# EAGLE board circuito v6-pv (EAGLE 9.4.2)
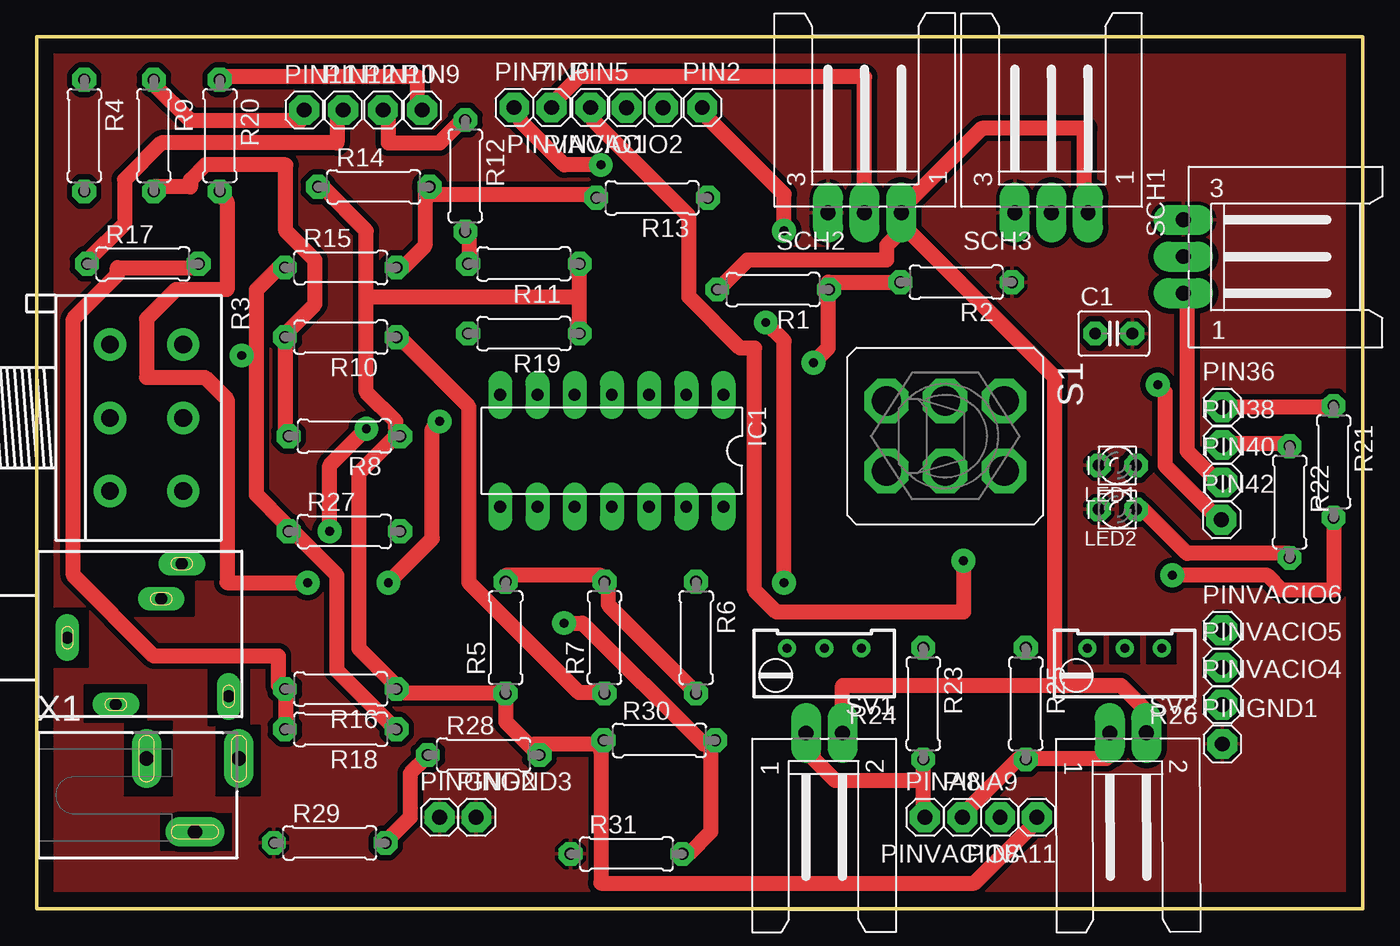
[diagram p0: board, top side]
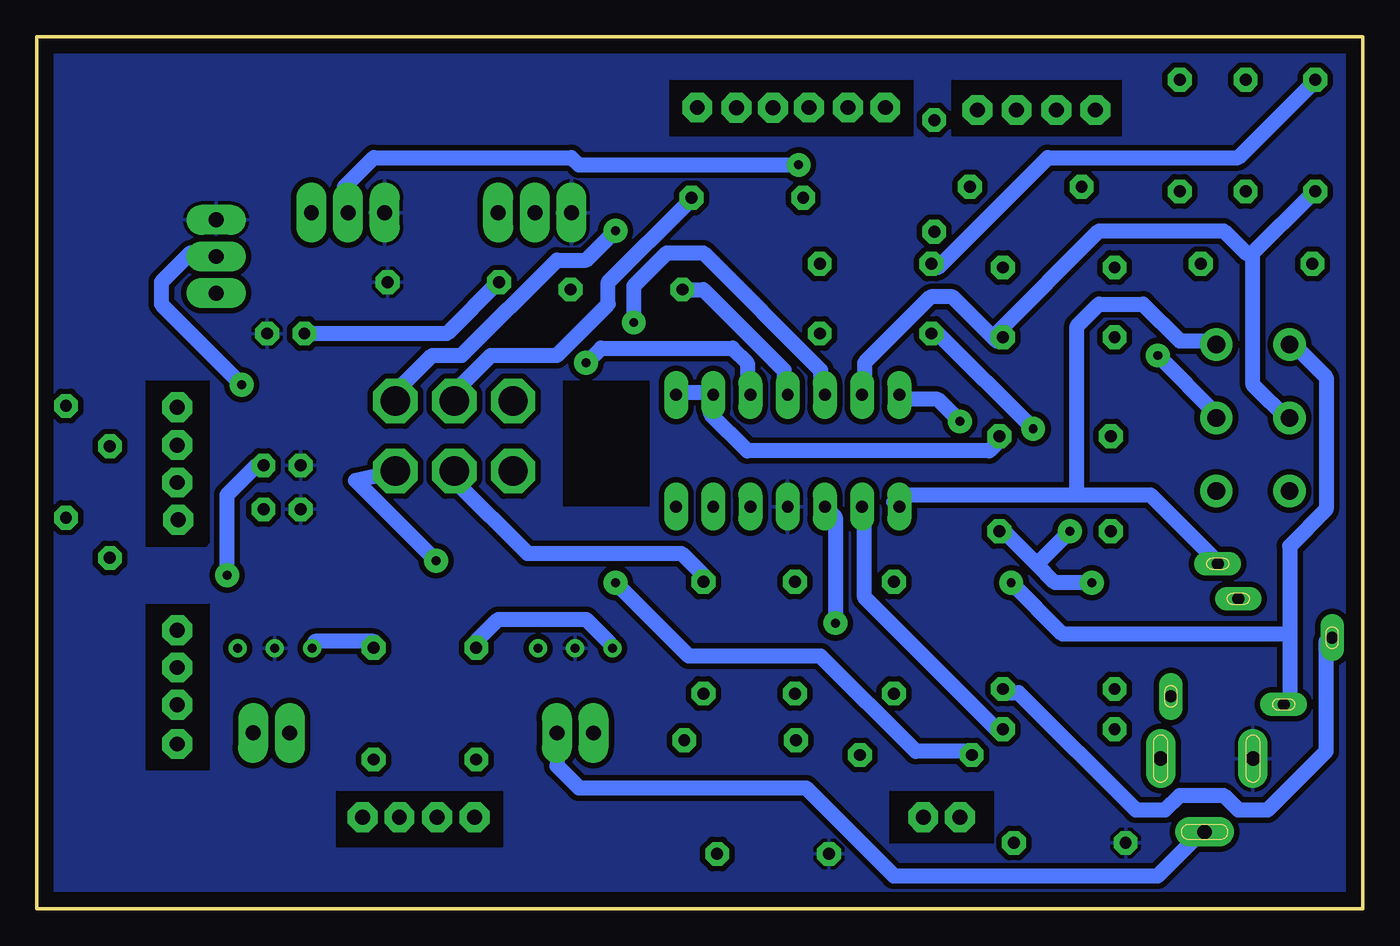
[diagram p1: board, bottom side, seen from below]

Size 90.5 x 59.5 mm. Coordinates in mm from the lower left corner, seen from the top.
Outline: 0,0 90.5,0 90.5,59.5 0,59.5 0,0
Copper layers (1*16): Top 0.035mm / dielectric 1.5mm / Bottom 0.035mm
Design rules "default *": minimum track width 40mil, minimum drill 24mil, track to track 15mil, track to pad 15mil, pad to pad 15mil, via to via 15mil, smd to smd 8mil, copper to edge 40mil, drill to drill 8mil, minimum pad ring 10mil, minimum via ring 20mil, stop-mask expansion 4mil, vias tented up to drill 0mil, thermal gap 10mil
Net classes: 1 vcc: width 0.305 mm
tRestrict: area 50.2,16.8 to 52.2,18.8; area 52.8,16.8 to 54.8,18.8; area 55.2,16.8 to 57.2,18.8; area 70.8,16.8 to 72.8,18.8; area 73.2,16.8 to 75.2,18.8; area 75.8,16.8 to 77.8,18.8; area 28.2,19.2 to 28.2,22.8; area 30.2,33 to 48.2,37.5; area 30.2,25.2 to 48.2,29.5; area 3.2,37 to 6.5,40; area 8.5,37 to 11.5,40; area 3.2,32 to 6.5,35; 12 more areas
bRestrict: area 25.2,4.5 to 32.2,8; area 58.8,4.2 to 70,8; area 78.8,9.5 to 83,20.8; area 78.8,24.8 to 83,36; area 16.5,52.8 to 28,56.5; area 30.8,52.8 to 47.2,56.5; area 48.8,27.5 to 54.5,36
vRestrict: area 50.5,48 to 75.5,59.2; area 78.5,38.2 to 90.5,50.5; area 48.8,0.2 to 58.5,11.8; area 69.5,0.2 to 79.5,11.8; area 48.8,14.2 to 58.8,19.2; area 69.2,14.2 to 79.2,19.2; area 0,3.5 to 13.8,59.2; area 30.2,29.5 to 48.2,33

## Footprints (pad centres in the part's own frame; a part is rotated, then mirrored left to right if it is on the bottom)
C025-030X050 = drill 0.813 octagon: 1 -1.27,0; 2 1.27,0
DIL14 = drill 0.813 long: 1 -7.62,-3.81; 2 -5.08,-3.81; 3 -2.54,-3.81; 4 0,-3.81; 5 2.54,-3.81; 6 5.08,-3.81; 7 7.62,-3.81; 8 7.62,3.81; 9 5.08,3.81; 10 2.54,3.81; 11 0,3.81; 12 -2.54,3.81; 13 -5.08,3.81; 14 -7.62,3.81
LED_LD260 = drill 0.813 octagon: A -1.27,0; K 1.27,0
1503_09 = drill 0.8 pad 1.2 long: 1 0,-2.1; 2 -4.55,-5.4; 3 5.05,-9.9; 4 -4,-13.1; 5 2.65,-8.5
1X01 = drill 1.016 octagon: 1 0,0
0207/7 = drill 0.813 octagon: 1 -3.81,0; 2 3.81,0
3RP/1610G = drill 1.2 pad 2.184: 1-1 -5,0; 1-2 0,0; 1-3 5,0; 2-1 -5,5; 2-2 0,5; 2-3 5,5
RTRIM64W = drill 0.61: 1 1.27,-2.54; 2 1.27,0; 3 1.27,2.54
320-938 = drill 2.007 octagon: 1 -2.388,4.013; 2 -2.388,0; 3 -2.388,-4.013; 4 2.388,4.013; 5 2.388,0; 6 2.388,-4.013
L03P = drill 1.016 long: 1 2.5,-6.25; 2 0,-6.25; 3 -2.5,-6.25
L02P = drill 1.016 long: 1 1.25,-6.25; 2 -1.25,-6.25
SCD-014-A = drill 1 pad 2 long: 1 -2.5,13.8; 2 -2.5,7.5; 3 2.5,10.8

## Placement (x,y rotation side)
C1  10micro  [C025-030X050]  73.5,39.25 0 top
IC1  LM324N  [DIL14]  39.25,31.25 180 top
LED1  [LED_LD260]  73.75,30.25 180 top
LED2  [LED_LD260]  73.75,27.25 180 top
PHONES  1503_09  [1503_09]  0,18.5 90 top
PIN2  [1X01]  45.42,54.67 0 top
PIN5  [1X01]  37.8,54.67 0 top
PIN6  [1X01]  35.13,54.67 0 top
PIN7  [1X01]  32.59,54.67 0 top
PIN9  [1X01]  26.3,54.5 0 top
PIN10  [1X01]  23.63,54.5 0 top
PIN11  [1X01]  18.25,54.5 0 top
PIN12  [1X01]  20.92,54.5 0 top
PIN36  [1X01]  80.9,34.22 0 top
PIN38  [1X01]  80.9,31.64 0 top
PIN40  [1X01]  80.9,29.09 0 top
PIN42  [1X01]  80.85,26.55 0 top
PINA8  [1X01]  60.62,6.25 0 top
PINA9  [1X01]  63.17,6.25 0 top
PINA11  [1X01]  68.25,6.25 180 top
PINGND1  [1X01]  80.9,11.25 0 top
PINGND2  [1X01]  27.5,6.25 0 top
PINGND3  [1X01]  30,6.25 0 top
PINVACIO1  [1X01]  40.25,54.65 180 top
PINVACIO2  [1X01]  42.75,54.65 180 top
PINVACIO4  [1X01]  80.9,13.92 0 top
PINVACIO5  [1X01]  80.9,16.47 0 top
PINVACIO6  [1X01]  80.9,19 0 top
PINVACIO8  [1X01]  65.75,6.25 180 top
R1  100k  [0207/7]  50.25,42.25 180 top
R2  100k  [0207/7]  62.75,42.75 180 top
R3  100k  [3RP/1610G]  5,33.5 270 top
R4  200k  [0207/7]  3.25,52.75 270 top
R5  10k  [0207/7]  32,18.5 90 top
R6  10k  [0207/7]  45,18.5 270 top
R7  100k  [0207/7]  38.75,18.5 90 top
R8  10k  [0207/7]  21,32.25 180 top
R9  10k  [0207/7]  8,52.75 270 top
R10  100k  [0207/7]  20.75,39 180 top
R11  10k  [0207/7]  33.25,44 180 top
R12  100k  [0207/7]  29.25,50 270 top
R13  10k  [0207/7]  42,48.5 180 top
R14  10k  [0207/7]  23,49.25 0 top
R15  100k  [0207/7]  20.75,43.75 0 top
R16  10k  [0207/7]  20.75,15 180 top
R17  10k  [0207/7]  7.25,44 0 top
R18  100k  [0207/7]  20.75,12.25 180 top
R19  1k  [0207/7]  33.25,39.25 180 top
R20  20k  [0207/7]  12.5,52.75 270 top
R21  220  [0207/7]  88.5,30.5 270 top
R22  220  [0207/7]  85.5,27.75 270 top
R23  10k  [0207/7]  60.5,14 270 top
R24  10k  [RTRIM64W]  53.75,16.5 90 top
R25  10k  [0207/7]  67.5,14 270 top
R26  10k  [RTRIM64W]  74.25,16.5 90 top
R27  100k  [0207/7]  21,25.75 0 top
R28  10k  [0207/7]  30.5,10.5 0 top
R29  100k  [0207/7]  20,4.5 0 top
R30  10k  [0207/7]  42.5,11.5 0 top
R31  100k  [0207/7]  40.25,3.75 0 top
S1  [320-938]  62,32.25 270 top
SCH1  [L03P]  84.5,44.5 270 top
SCH2  [L03P]  56.5,53.75 0 top
SCH3  [L03P]  69.25,53.75 0 top
SV1  [L02P]  53.75,5.75 180 top
SV2  [L02P]  74.5,5.75 180.2 top
X1  [SCD-014-A]  0,7.75 270 top

## Library data of the parts
C1 = rcl; SPICEPREFIX: C
IC1 = linear; SPICEPREFIX: X
LED1 LED2 = eagle-ltspice; SPICEMODEL: DMOD; SPICEPREFIX: D; SPICETYPE: diode
PHONES = con-lumberg; OC_FARNELL: 1243244; OC_NEWARK: unknown; SPICEPREFIX: X
PIN2 PIN5-PIN7 PIN9-PIN12 PIN36 PIN38 PIN40 PIN42 PINA8 PINA9 PINA11 PINGND1-PINGND3 PINVACIO1 PINVACIO2 PINVACIO4-PINVACIO6 PINVACIO8 = pinhead; SPICEPREFIX: X
R1 R2 R4-R23 R25 R27-R31 = rcl; SPICEPREFIX: R
R3 = pot; SPICEPREFIX: J
R24 R26 = rcl; SPICEMODEL: X; SPICEPREFIXL: POT
S1 = switch
SCH1-SCH3 SV1 SV2 = con-amp-mt; OC_FARNELL: unknown; OC_NEWARK: unknown; SPICEPREFIX: X
X1 = con-shiua-chyuan; OC_FARNELL: unknown; OC_NEWARK: unknown; SPICEPREFIX: X

## Nets
GND: C1.2 IC1.11 LED1.K LED2.K PINGND1.1 PINGND2.1 PINGND3.1 R2.1 R24.2 R26.2 R29.1 R31.1 SCH1.3 SCH2.3 SCH3.3 X1.2
N$1: C1.1 IC1.3 R1.1 R2.2
N$2: R25.1 R26.3
N$3: PIN11.1 R9.1
N$4: IC1.6 R3.1-2 R4.2 R7.1 R10.1
N$5: R5.2 R6.2 R7.2
N$6: R6.1 S1.5
N$7: PIN5.1 S1.4
N$8: IC1.1 IC1.2 PHONES.1 PINA11.1 R5.1 R8.1 R11.1 R14.1 R16.1 R19.1 R28.2 R30.1
N$9: R8.2 R9.2 R10.2
N$10: IC1.10 R30.2 R31.2
N$11: R4.1 R11.2 R12.2
N$12: PIN10.1 R12.1
N$13: IC1.9 R3.2-2 R15.1 R18.1 R27.1
N$14: R13.2 R14.2 R15.2
N$15: R13.1 S1.2
N$16: PIN2.1 S1.1
N$17: IC1.5 R28.1 R29.2
N$18: R19.2 R20.2 R27.2
N$19: R16.2 R17.2 R18.2
N$20: PIN12.1 R17.1
N$21: PIN9.1 R20.1
N$22: PIN42.1 SCH1.2
N$23: PIN40.1 SCH1.1
N$24: LED1.A R21.2
N$25: PIN36.1 R21.1
N$26: LED2.A R22.2
N$27: PIN38.1 R22.1
N$28: PIN7.1 SCH3.2
N$29: PIN6.1 SCH2.2
N$30: IC1.8 PHONES.3 R3.2-1
N$31: PINA8.1 R23.2 SV1.1
N$32: R23.1 R24.3
N$34: PINA9.1 R25.2 SV2.1
N$37: IC1.7 PHONES.2 R3.1-1
VCC: IC1.4 R1.2 SCH2.1 SCH3.1 SV1.2 SV2.2 X1.3

## Tracks (layer width: path | path; a pad name or v marks a point on that pad's centre or on a via)
GND
  pour Top: 0,59.5 0,0 90.5,0 90.5,22.25 90.5,59.5
  pour Bottom: 0,59.5 0,0 90.5,0 90.5,59.5
N$1  (via drill 0.61)
  Top 1.016: v53,37.25 54,38.25 54,42.25 R1.1 54,42.75 R2.2
  Bottom 1.016: v53,37.25 52,38.25 43,38.25 42,37.25 42,35.25 IC1.3 | C1.1 62.5,39.25 59,42.75 R2.2
N$2
  Bottom 1.016: R26.3 71.5,18.25 67.5,18.25 R25.1
N$3
  Top 1.016: R9.1 8,56.25 10.5,53.75 18,53.75 18,54.25 PIN11.1
N$4
  Top 1.016: R10.1 25,38.75 29.5,34.25 29.5,22.25 37,14.75 38.5,14.75 R7.1
  Bottom 1.016: 7.5,44.75 3.5,48.75 R4.2 | 7.5,44.75 7.5,35.75 5,33.25 R3.1-2 | IC1.6 34,35.25 34,37.25 29.5,41.75 28,41.75 25,38.75 R10.1 25,39.25 18,46.25 9.5,46.25 8,44.75 7.5,44.75
N$5
  Top 1.016: R5.2 32,22.75 38.5,22.75 R7.2 39,22.25 39,20.75 45,14.75 R6.2
N$6
  Bottom 1.016: S1.5 62,29.25 57,24.25 46.5,24.25 45,22.75 R6.1
N$7  (via drill 0.61)
  Top 1.016: v63.25,23.75 63.25,20.25 50.5,20.25 49,21.75 49,38.25 48,38.25 44.5,41.75 44.5,47.25 38,53.75 38,54.25 PIN5.1
  Bottom 1.016: v63.25,23.75 68.73,29.23 S1.4
N$8
  Top 1.016: PINA11.1 68,6.25 68,5.75 64,1.75 38.5,1.75 38.5,10.75 R30.1 38.5,11.25 34,11.25 R28.2 34,10.75 32,12.75 R5.1 31.5,14.75 25,14.75 R16.1 24.5,15.25 22,17.75 22,29.75 24.5,32.25 R8.1 24.5,32.75 24.5,33.25 22.5,35.25 22.5,41.75 | 37,41.75 37,43.75 R11.1 | 37,41.75 37,39.25 R19.1 | 22.5,41.75 22.5,46.25 19.5,49.25 R14.1 | 22.5,41.75 37,41.75
  Bottom 1.016: IC1.1 46.5,35.25 44.5,35.25 IC1.2 44.5,34.75 44.5,33.75 42,31.25 25.5,31.25 24.5,32.25 R8.1 | PHONES.1 2.5,18.25 2.5,10.75 6.5,6.75 8.5,6.75 9.5,7.75 12.5,7.75 13.5,6.75 15.5,6.75 23.5,14.75 24.5,14.75 R16.1
N$9
  Top 1.016: R8.2 17,32.25 17,38.75 R10.2 17,39.25 19,41.25 19,44.25 17,46.25 17,50.75 11.5,50.75 10.5,49.75 10.5,49.25 8,49.25 R9.2
N$10  (via drill 0.61)
  Top 1.016: R31.2 44.5,3.75 46,5.25 46,11.25 R30.2 45.5,11.25 37.25,19.5 v36,19.5
  Bottom 1.016: IC1.10 36,26.73 v36,19.5
N$11
  Top 1.016: R11.2 29.5,44.25 29.5,45.75 R12.2
  Bottom 1.016: R4.1 3.5,56.25 8.5,51.25 21.5,51.25 29,43.75 R11.2
N$12
  Top 1.016: R12.1 29,53.75 27.5,52.25 24,52.25 24,54.25 PIN10.1
N$13  (via drill 0.61)
  Top 1.016: R18.1 24.5,12.25 20.5,16.25 20.5,22.75 17.5,25.75 R27.1 17,26.25 15,28.25 15,37.75 | 15,37.75 15,42.25 16.5,43.75 R15.1 | v14,37.75 15,37.75
  Bottom 1.016: IC1.9 34,27.25 34,21.25 25,12.25 R18.1 | v14,37.75 10,33.75 R3.2-2
N$14
  Top 1.016: R15.2 25,43.75 26.5,45.25 26.5,49.25 R14.2 27,48.75 38,48.75 R13.2
N$15
  Bottom 1.016: S1.2 62,35.25 59.5,37.75 55,37.75 51.5,41.25 51.5,42.75 46,48.25 R13.1
N$16  (via drill 0.61)
  Top 1.016: v51,46.25 51,48.75 45.5,54.25 PIN2.1
  Bottom 1.016: v51,46.25 53,44.25 55,44.25 61.5,37.75 63.5,37.75 66.5,34.75 S1.1
N$17  (via drill 0.61)
  Top 1.016: R29.2 24,4.75 25.5,6.25 25.5,9.25 26.5,10.25 R28.1 | v49.75,40 51,38.75 v51,22.25
  Bottom 1.016: v49.75,40 49.75,42.5 47.5,44.75 45,44.75 37,36.75 37,35.25 IC1.5 | v51,22.25 46,17.25 37,17.25 30.5,10.75 27,10.75 R28.1
N$18  (via drill 0.61)
  Top 1.016: v18.5,22.25 13,22.25 13,34.75 11.5,36.25 7.5,36.25 7.5,40.25 9.5,42.25 13,42.25 13,48.25 12.5,48.75 R20.2 | v22.5,32.75 20,30.25 v20,25.75
  Bottom 1.016: 22.25,23.5 21,22.25 v18.5,22.25 | 22.25,23.5 24.5,25.75 R27.2 | v22.5,32.75 29,39.25 R19.2 | 22.25,23.5 v20,25.75
N$19
  Top 1.016: R18.2 17,12.25 17,14.75 R16.2 16.5,15.25 16.5,17.25 8,17.25 2.5,22.75 2.5,40.25 5.5,43.25 5.5,43.75 11,43.75 R17.2
N$20
  Top 1.016: R17.1 3.5,44.25 6,46.75 6,49.75 8.5,52.25 20.5,52.25 20.5,54.25 PIN12.1
N$21
  Top 1.016: R20.1 12.5,56.75 26,56.75 26,54.75 PIN9.1
N$22  (via drill 0.61)
  Top 1.016: v76.5,35.75 77,35.25 77,30.25 80.5,26.75 PIN42.1
  Bottom 1.016: v76.5,35.75 82,41.25 82,42.75 80,44.75 78.5,44.75 SCH1.2
N$23
  Top 1.016: PIN40.1 80.5,29.25 78.5,31.25 78.5,41.75 SCH1.1
N$24  (via drill 0.61)
  Top 1.016: v77.5,22.75 84,22.75 85,21.75 88.5,21.75 R21.2
  Bottom 1.016: v77.5,22.75 77.5,28.25 75.5,30.25 LED1.A
N$25
  Top 1.016: R21.1 88.5,34.25 81,34.25 PIN36.1
N$26
  Top 1.016: LED2.A 75.5,27.25 78.5,24.25 85.5,24.25 R22.2
N$27
  Top 1.016: R22.1 85.5,31.75 81,31.75 PIN38.1
N$28  (via drill 0.61)
  Top 1.016: v38.5,50.75 36,50.75 33,53.75 33,54.25 PIN7.1
  Bottom 1.016: v38.5,50.75 53.5,50.75 54,51.25 67.5,51.25 69.5,49.25 69.5,47.75 SCH3.2
N$29
  Top 1.016: SCH2.2 56.5,56.75 37,56.75 35.5,55.25 35.5,54.75 PIN6.1
N$30
  Bottom 1.016: 19.5,28.25 31.5,28.25 32,27.75 IC1.8 | 19.5,28.25 14.5,28.25 10,23.75 PHONES.3 | 19.5,28.25 19.5,39.75 18,41.25 15,41.25 12.5,38.75 10,38.75 R3.2-1
N$31
  Top 1.016: 60.5,8.75 60.5,6.25 PINA8.1 | 60.5,8.75 R23.2 | 60.5,8.75 54.5,8.75 53,10.25 53,11.25 52.5,11.75 SV1.1
N$32
  Bottom 1.016: R24.3 51.5,18.25 53,19.75 59,19.75 60.5,18.25 R23.1
N$34
  Top 1.016: SV2.1 73,11.75 73,10.25 67.5,10.25 R25.2 67,10.25 63.5,6.75 63.5,6.25 PINA9.1
N$37  (via drill 0.61)
  Top 1.016: v27.5,33.25 27,32.75 27,25.25 v24,22.25
  Bottom 1.016: 5,18.75 5,24.75 2.5,27.25 2.5,36.25 5,38.75 R3.1-1 | 5,18.75 5,14.25 PHONES.2 | v27.5,33.25 29,34.75 31.5,34.75 IC1.7 | v24,22.25 20.5,18.75 5,18.75
VCC
  Top 1.016: SCH2.1 59,47.75 64.5,53.25 71.5,53.25 71.5,47.75 SCH3.1 | SCH2.1 59,46.25 58,45.25 58,44.25 48.5,44.25 46.5,42.25 R1.2 | 69.5,15.25 55,15.25 SV1.2 | 69.5,15.25 74,15.25 75.5,13.75 75.5,12.25 SV2.2 | 69.5,15.25 69.5,36.25 59.5,46.25 SCH2.1
  Bottom 1.016: R1.2 45,42.25 39.5,36.75 39.5,35.25 IC1.4 | SV1.2 55,9.75 53.5,8.25 38,8.25 32,2.25 14,2.25 11,5.25 X1.3